# Altium PCB F405RG_Core.PcbDoc
Units mil, origin at the board's own origin, x right, y up, seen from the top; angles counter-clockwise.
Board outline 6000 x 4000 mil, 2 copper layers (Top Layer, Bottom Layer); 21 components, 60 nets, 158 pads, 2 vias.
Unrouted connection lines stored in the file: 32.
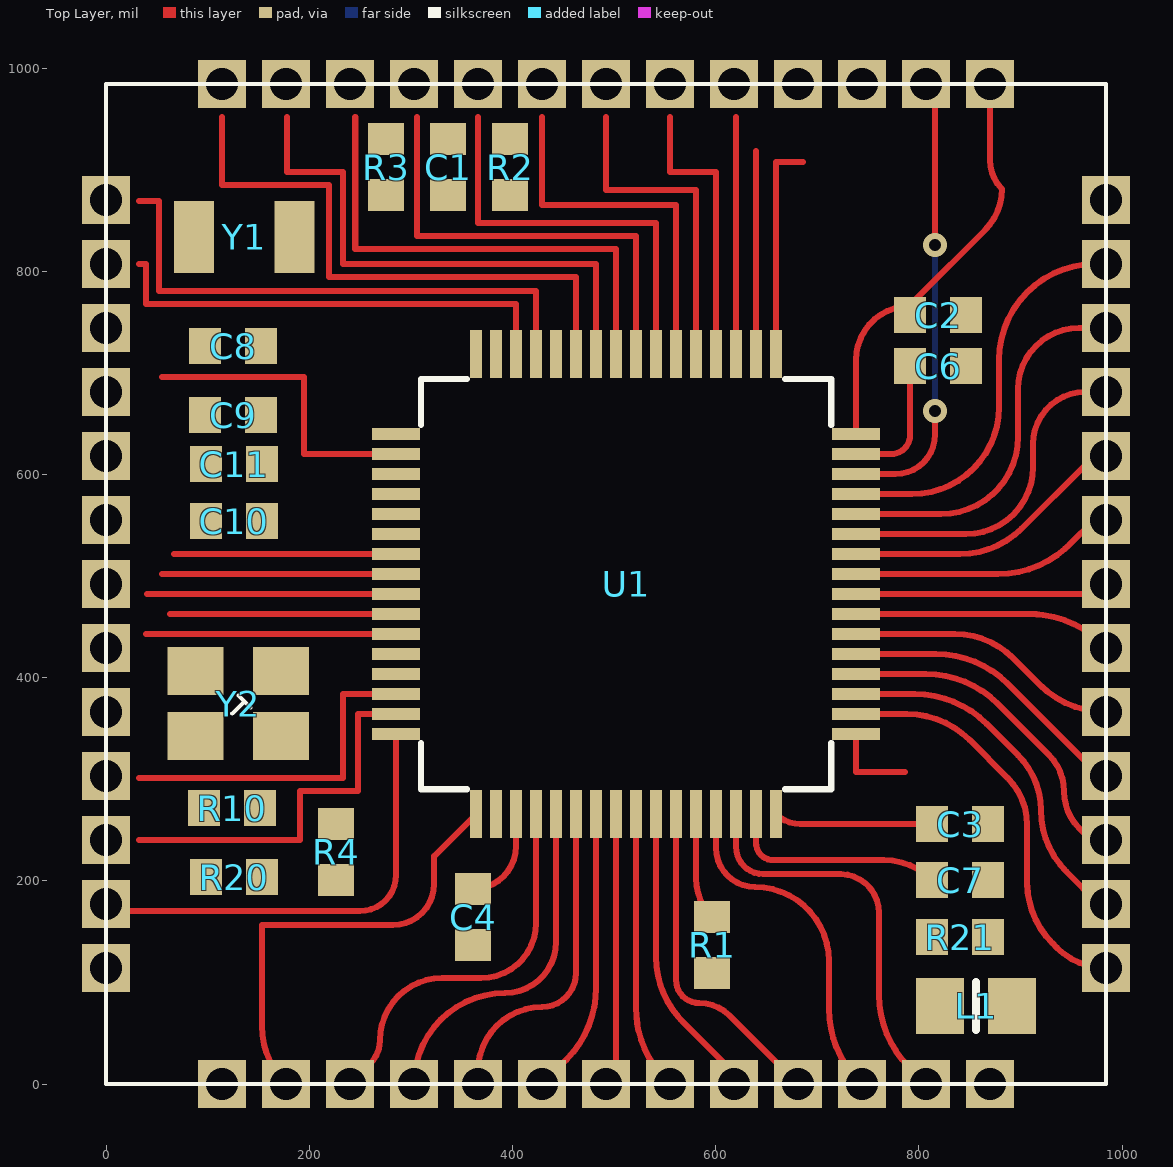
[diagram p0: Top Layer view]
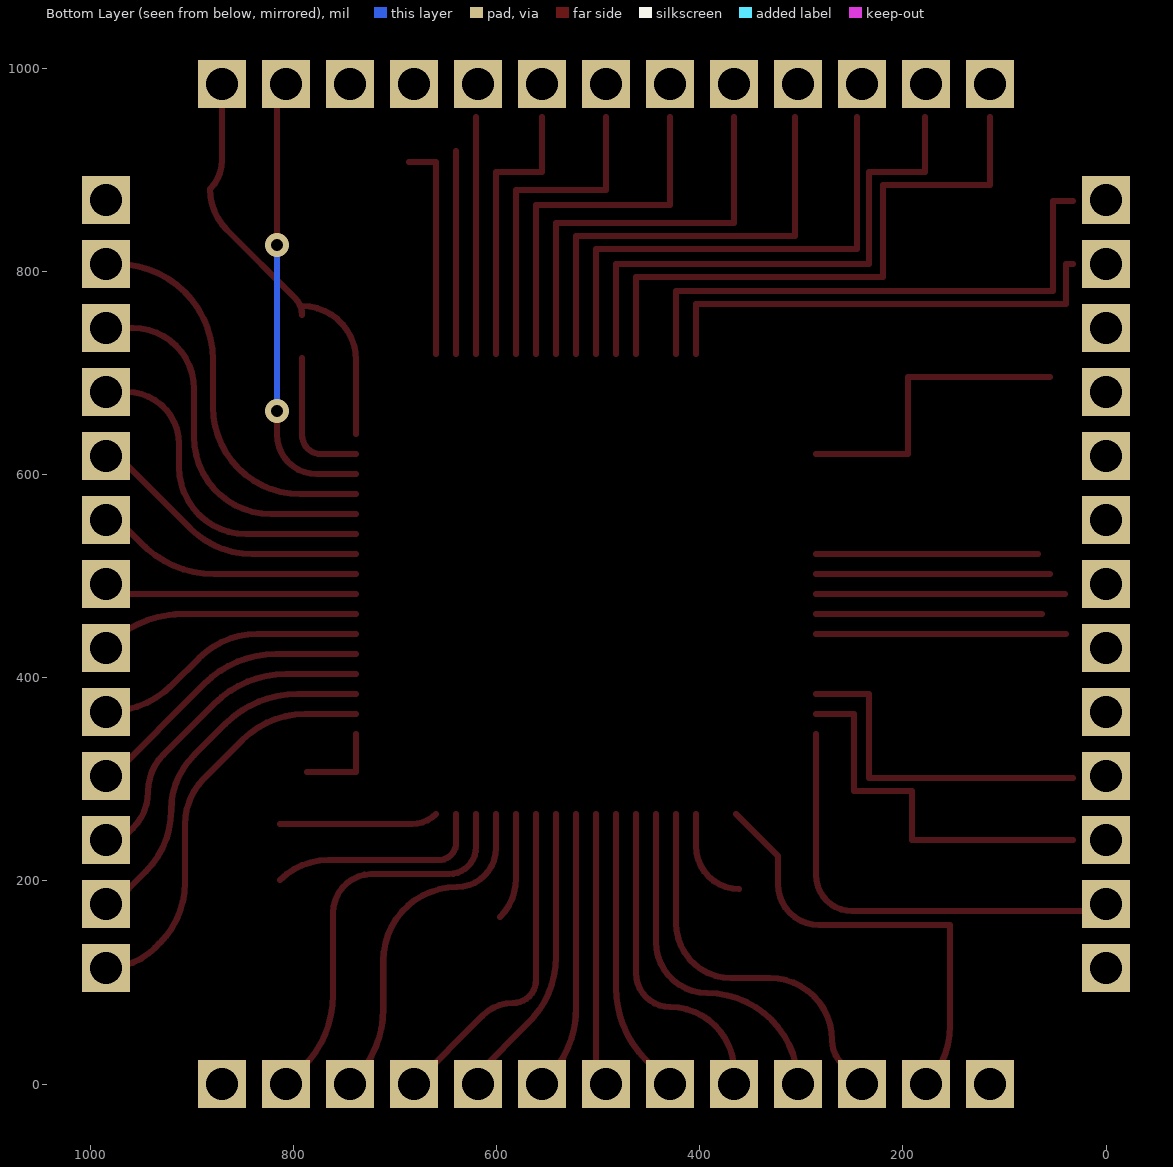
[diagram p1: Bottom Layer view, seen from below]

## Layer stack, top to bottom
Top Solder: solder mask 0.4, Solder Resist, Dk 3.5
Top Layer: signal copper 1.4
Dielectric 1: dielectric 12.6, FR-4, Dk 4.8
Bottom Layer: signal copper 1.4
Bottom Solder: solder mask 0.4, Solder Resist, Dk 3.5

## Board outline
-9101,-2346.26 -3101,-2346.26 -3101,1653.74 -9101,1653.74

## Design rules (kind name [scope] priority, off if disabled: settings)
Clearance [All] p1: gap=6 ignorepadtopadclearanceinfootprint=FALSE
PolygonConnect [All] p1: connectstyle=Relief reliefconductorwidth=10 reliefentries=4 polygonreliefangle="90 Angle" airgapwidth=10
RoutingVias [All] p1: holewidth=12 width=24 viastyle="Through Hole" minholewidth=12 minwidth=18 maxholewidth=28 maxwidth=50
SolderMaskExpansion [All] p1: expansion=4
Width [All] p1: maxlimit=10000 minlimit=6 preferedwidth=9
30 further rules are at their usual default settings.

## Components (designator, comment, footprint, x,y, rotation, side; value= is the part's Value field where it differs from the comment)
C1 "104" 0603 336.61,902.56 r270 top
C2 "104" 0603 818.9,756.89 r180 top
C3 "104" 0603 840.55,255.91 r180 top
C4 "104" 0603 361.22,164.37 r90 top
C6 "2.2u" 0603 818.9,706.69 r180 top
C7 "2.2u" 0603 840.55,200.79 r180 top
C8 "15p" 0603 125,726.38 r180 top
C9 "15p" 0603 125,658.46 r180 top
C10 "22p" 0603 125.98,554.13 r180 top
C11 "22p" 0603 125.98,610.24 r180 top
L1 "Red" 0805 856.3,76.77 r180 top
R1 "10k" 0603 596.46,136.81 r90 top
R2 "10k" 0603 397.64,902.56 r90 top
R3 "10k" 0603 275.59,902.56 r270 top
R4 "10" 0603 226.38,228.35 r270 top
R10 "1M" 0603 124.02,271.65 r0 top
R20 "10k" 0603 125.98,203.74 r180 top
R21 "1k" 0603 840.55,144.69 r180 top
U1 "STM32F4x5RG" LQFP64-10x10mm 511.81,492.13 r0 top value=Value
Y1 "32" 3215-2 185.61,833.66 r180 top
Y2 "25" 3225-4 201.24,431.52 r180 top

## Footprints (in the part's own frame and the unit in brackets; to place one, negate y for a bottom-side part, rotate by r counter-clockwise, add the part's x,y. Pads: shape width x height; smd on the part's side, far side on the other; paste and mask are expansions set on the pad)
0603 [mm] "Chip Capacitor, Body 1.6x0.8mm, IPC High Density"
  rect 0.8x0.9 smd: 1(-0.7,0) 2(0.7,0)
  body extent -0.87,-0.48 0.87,0.48, height 1.3
0805 [mm] "Chip Resistor, Body 2.0x1.2mm, IPC Medium Density"
  rect 1.2x1.4 smd: 1(-0.9,0) 2(0.9,0)
  silkscreen extent 0,-0.6 0,0.6, body extent -1.07,-0.7 1.08,0.7, height 0.7
3215-2 [mm] "XTAL"
  rect 1x1.8 smd: 1(0,0) 2(2.515,0)
3225-4 [mm] "XTAL"
  rect 1.4x1.2 smd: 1(0.737,0.635) 2(2.87,0.635) 3(2.87,2.261) 4(0.737,2.261)
  silkscreen extent 1.5,1.24 1.96,1.7
LQFP64-10x10mm [mil]
  rect 47x12 smd: 1(-226.38,147.64) 2(-226.38,127.95) 3(-226.38,108.27) 4(-226.38,88.58) 5(-226.38,68.9) 6(-226.38,49.21) 7(-226.38,29.53) 8(-226.38,9.84) 9(-226.38,-9.84) 10(-226.38,-29.53) 11(-226.38,-49.21) 12(-226.38,-68.9) 13(-226.38,-88.58) 14(-226.38,-108.27) 15(-226.38,-127.95) 16(-226.38,-147.64) 33(226.38,-147.64) 34(226.38,-127.95) 35(226.38,-108.27) 36(226.38,-88.58) 37(226.38,-68.9) 38(226.38,-49.21) 39(226.38,-29.53) 40(226.38,-9.84) 41(226.38,9.84) 42(226.38,29.53) 43(226.38,49.21) 44(226.38,68.9) 45(226.38,88.58) 46(226.38,108.27) 47(226.38,127.95) 48(226.38,147.64)
  rect 12x47 smd: 17(-147.64,-226.38) 18(-127.95,-226.38) 19(-108.27,-226.38) 20(-88.58,-226.38) 21(-68.9,-226.38) 22(-49.21,-226.38) 23(-29.53,-226.38) 24(-9.84,-226.38) 25(9.84,-226.38) 26(29.53,-226.38) 27(49.21,-226.38) 28(68.9,-226.38) 29(88.58,-226.38) 30(108.27,-226.38) 31(127.95,-226.38) 32(147.64,-226.38) 49(147.64,226.38) 50(127.95,226.38) 51(108.27,226.38) 52(88.58,226.38) 53(68.9,226.38) 54(49.21,226.38) 55(29.53,226.38) 56(9.84,226.38) 57(-9.84,226.38) 58(-29.53,226.38) 59(-49.21,226.38) 60(-68.9,226.38) 61(-88.58,226.38) 62(-108.27,226.38) 63(-127.95,226.38) 64(-147.64,226.38)
  silkscreen extent -202,-202 202,202, body extent -236,-236 236,236, height 63

## Part data
C1 C2 C3 C4 C6 C7 C8 C9 C10 C11: library part C, "Capacitor", LatestRevisionDate=17-Jul-2002, LatestRevisionNote="Re-released for DXP Platform.", PackageDescription="Radial Cap, Thru-Hole; 2 Leads; 0.3 in Pin Spacing", PackageReference=RAD-0.3, Published=8-Jun-2000, Publisher="Altium Limited"
L1: library part LED, "LED", LatestRevisionDate=08-Jul-2005, LatestRevisionNote="Mech Layer 1 removed.", PackageDescription="LED; 2 Leads", PackageReference=LED-0, Published=8-Jun-2000, Publisher="Altium Limited"
R1 R2 R3 R4 R10 R20 R21: library part R, "Resistor", LatestRevisionDate=17-Jul-2002, LatestRevisionNote="Re-released for DXP Platform.", PackageDescription="Axial Device, Thru-Hole; 2 Leads; 0.4 in Pin Spacing", PackageReference=AXIAL-0.4, Published=8-Jun-2000, Publisher="Altium Limited"
U1: "Mcu", Manufacturer_Part_Number=stm32f4x5rg, C="Copyright (C) 2016 Accelerated Designs. All rights reserved", Copyright="Copyright (C) 2016 Accelerated Designs. All rights reserved", RefDes=RefDes, Type=Type, Vendor=STMicroelectronics
Y1 Y2: library part XTAL, "Crystal Oscillator", LatestRevisionDate=17-Jul-2002, LatestRevisionNote="Re-released for DXP Platform.", Published=8-Jun-2000, Publisher="Altium Limited"

## Free pads (board coordinates)
  rect 47.24x47.24 hole 31.5: 8(114.17,984.25) 8(984.25,114.17) 9(0,114.17) 9(0,177.17) 9(0,303.15) 9(0,429.13) 9(0,555.12) 9(0,681.1) 9(0,807.09) 9(114.17,0) 9(177.17,0) 9(177.17,984.25) 9(303.15,984.25) 9(303.15,0) 9(429.13,0) 9(429.13,984.25) 9(555.12,984.25) 9(555.12,0) 9(681.1,0) 9(681.1,984.25) 9(807.09,984.25) 9(807.09,0) 9(870.08,984.25) 9(984.25,177.17) 9(984.25,303.15) 9(984.25,429.13) 9(984.25,555.12) 9(984.25,681.1) 9(984.25,807.09) 9(984.25,870.08) 10(0,240.16) 10(0,366.14) 10(0,492.13) 10(0,618.11) 10(0,744.09) 10(0,870.08) 10(240.16,0) 10(240.16,984.25) 10(366.14,984.25) 10(366.14,0) 10(492.13,0) 10(492.13,984.25) 10(618.11,0) 10(618.11,984.25) 10(744.09,0) 10(744.09,984.25) 10(870.08,0) 10(984.25,240.16) 10(984.25,366.14) 10(984.25,492.13) 10(984.25,618.11) 10(984.25,744.09)

## Via types
v1: diameter 24, hole 12, Top Layer to Bottom Layer, 2 vias

## Nets (pads, with @x,y where several pads share a name; then routed paths per layer and width w, separated by ;. In a path a pad name is that pad's centre, name@x,y a point inside that pad or via, vN(x,y) a via of type N, cw(c..) or ccw(c..) an arc to the next point about the centre after c; other vN are vias at no path point)
A0: pad.9@0,303.15 U1.14 | length 335.5
  Top Layer w6: 32.62,301.18 233.27,301.18 233.27,383.86 U1.14
A1: pad.10@0,240.16 U1.15 | length 376.8
  Top Layer w6: 32.62,240.16 190.94,240.16 190.94,288.39 248.03,288.39 248.03,364.17 U1.15
A2: pad.9@0,177.17 U1.16 | length 439.5
  Top Layer w6: pad.9@4.92,170.28 250,170.28 ccw(c250,205.71) 285.43,205.71 U1.16
A3: pad.9@177.17,0 U1.17 | length 441.2
  Top Layer w6: pad.9@177.17,0 cw(c234.19,57.03) 153.54,57.03 153.54,156.5 282.48,156.5 ccw(c282.48,196.85) 322.83,196.85 322.83,224.41 U1.17
A4: pad.10@240.16,0 U1.20 | length 380.7
  Top Layer w6: pad.10@240.16,0 259.94,19.78 ccw(c236.42,43.31) 269.69,43.31 cw(c330.71,43.31) 330.71,104.33 369.09,104.33 ccw(c369.09,158.46) 423.23,158.46 U1.20
A5: pad.9@303.15,0 U1.21 | length 345.5
  Top Layer w6: pad.9@303.15,0 cw(c392.72,0) 392.72,89.57 ccw(c392.72,139.76) 442.91,139.76 U1.21
A6: pad.10@366.14,0 U1.22 | length 320.8
  Top Layer w6: pad.10@366.14,0 366.14,12.8 cw(c429.13,12.8) 429.13,75.79 ccw(c429.13,109.25) 462.6,109.25 U1.22
A7: pad.9@429.13,0 U1.23 | length 283.5
  Top Layer w6: pad.9@429.13,0 452.99,23.86 ccw(c382.28,94.57) 475.38,58.07 ccw(c382.28,94.57) 482.28,94.57 U1.23
A8: pad.9@984.25,555.12 U1.41 | length 252
  Top Layer w6: U1.41 877.87,501.97 ccw(c877.87,601.97) 943.9,526.87 ccw(c877.87,601.97) 948.58,531.26 pad.9@972.44,555.12
A9: pad.10@984.25,618.11 U1.42 | length 281.1
  Top Layer w6: U1.42 840.55,521.65 ccw(c840.55,607.2) 901.01,546.68 ; 901.04,546.71 pad.10@964.09,609.76 ; pad.10@964.1,609.77 cw(c984.25,589.6) pad.10@984.25,618.11
A10: pad.9@984.25,681.1 U1.43 | length 335.6
  Top Layer w6: U1.43 846.46,541.34 ccw(c846.46,607.28) 912.4,607.28 912.4,629.92 cw(c963.58,629.92) 963.58,681.1 pad.9@984.25,681.1
A11: pad.10@984.25,744.09 U1.44 | length 370.8
  Top Layer w6: U1.44 821.85,561.02 ccw(c821.85,636.81) 897.64,636.81 897.64,684.06 cw(c957.68,684.06) 957.68,744.09 pad.10@984.25,744.09
A12: pad.9@984.25,807.09 U1.45 | length 395.1
  Top Layer w6: U1.45 793.31,580.71 ccw(c793.31,666.34) 878.94,666.34 878.94,712.6 cw(c973.43,712.6) 973.43,807.09 pad.9@984.25,807.09
A13: pad.9@807.09,984.25 U1.46 | length 447.3
  Top Layer w6: U1.46 777.07,600.39 ccw(c777.07,639.27) 815.94,639.27 v1(815.94,662.4) ; pad.9@807.09,984.25 cw(c785.7,962.87) 815.94,962.87 v1(815.94,825.79)
  Bottom Layer w6: v1(815.94,662.4) v1(815.94,825.79)
A14: U1.49 | length 215.6
  Top Layer w6: U1.49 659.45,907.48 686.02,907.48
A15: U1.50 | length 199.8
  Top Layer w6: U1.50 639.76,918.31
B0: pad.10@618.11,0 U1.26 | length 293.7
  Top Layer w6: U1.26 541.34,125 ccw(c631.63,125) 563.33,65.94 ccw(c631.63,125) 567.79,61.15 618.11,10.83 pad.10@618.11,0
B1: pad.9@681.1,0 U1.27 | length 327.6
  Top Layer w6: U1.27 561.02,102.36 ccw(c583.66,102.36) 583.66,79.72 cw(c583.66,36.95) 613.9,67.2 pad.9@681.1,0
B3: U1.55 | length 408.3
  Top Layer w6: 366.14,951.63 366.14,847.44 541.34,847.44 U1.55
B4: U1.56 | length 448.7
  Top Layer w6: 306.1,951.63 306.1,834.65 521.65,834.65 U1.56
B5: U1.57 | length 489.8
  Top Layer w6: 245.27,951.63 245.27,821.85 501.97,821.85 U1.57
B6: U1.58 | length 537.3
  Top Layer w6: 178.15,951.63 178.15,897.64 233.27,897.64 233.27,807.09 482.28,807.09 U1.58
B7: U1.59 | length 581.6
  Top Layer w6: 114.17,951.63 114.17,884.84 219.49,884.84 219.49,794.29 462.6,794.29 U1.59
B8: U1.61 | length 541.2
  Top Layer w6: 32.62,869.09 52.17,869.09 52.17,780.51 423.23,780.51 U1.61
B9: U1.62 | length 459.5
  Top Layer w6: 32.62,807.09 39.37,807.09 39.37,767.72 403.54,767.72 U1.62
B10: pad.10@744.09,0 U1.29 | length 338.4
  Top Layer w6: U1.29 600.39,232.28 ccw(c638.78,232.28) 638.78,193.9 cw(c638.78,121.25) 711.43,121.25 711.43,74.09 ccw(c811.43,74.09) 740.71,3.38 pad.10@744.09,0
B11: pad.9@807.09,0 U1.30 | length 393.5
  Top Layer w6: U1.30 620.08,233.27 ccw(c646.65,233.27) 646.65,206.69 722.44,206.69 cw(c722.44,168.31) 723.43,206.68 cw(c722.44,168.31) 760.83,168.31 760.83,87.68 ccw(c860.83,87.68) 790.12,16.97 pad.9@807.09,0
B12: pad.10@870.08,0 U1.33 | length 85.6
  Top Layer w6: U1.33 738.19,307.09 786.42,307.09
B13: pad.8@984.25,114.17 U1.34 | length 406
  Top Layer w6: U1.34 788.39,364.17 cw(c788.39,277.17) 849.88,338.72 ; 849.91,338.69 887.52,301.08 cw(c841.36,254.92) 906.64,254.92 906.64,198.08 ccw(c990.41,198.08) 931.17,138.85 935.77,134.26 ; 935.78,134.24 ccw(c984.25,182.74) pad.8@984.25,114.17
B14: pad.9@984.25,177.17 U1.35 | length 352.6
  Top Layer w6: U1.35 796,383.86 cw(c796,283.86) 866.71,354.57 897.81,323.47 cw(c844.02,269.69) 920.09,269.69 ccw(c1005.63,269.69) 945.14,209.2 pad.9@977.17,177.17
B15: pad.10@984.25,240.16 U1.36 | length 329.8
  Top Layer w6: U1.36 807,403.54 cw(c807,303.54) 877.71,374.25 927.95,324.02 cw(c891.83,287.89) 942.91,287.89 ccw(c994,287.89) 957.88,251.77 969.49,240.16 pad.10@984.25,240.16
C0: pad.9@0,555.12 U1.8 | length 230.3
  Top Layer w6: 55.12,501.97 U1.8
C1: pad.10@0,492.13 U1.9 | length 245.1
  Top Layer w6: 40.35,482.28 U1.9
C2: pad.9@0,429.13 U1.10 | length 222.4
  Top Layer w6: 62.99,462.6 U1.10
C3: pad.10@0,366.14 U1.11 | length 246.1
  Top Layer w6: 39.37,442.91 U1.11
C4: pad.10@492.13,0 U1.24 | length 268.4
  Top Layer w6: pad.10@492.13,0 ccw(c468.36,23.76) 501.97,23.76 U1.24
C5: pad.9@555.12,0 U1.25 | length 275.3
  Top Layer w6: U1.25 521.65,74.89 ccw(c621.65,74.89) 524.27,52.17 ccw(c621.65,74.89) 550.94,4.18 pad.9@555.12,0
C6: pad.9@984.25,303.15 U1.37 | length 299.1
  Top Layer w6: U1.37 816.85,423.23 cw(c816.85,323.23) 887.56,393.94 pad.9@978.35,303.15 ; pad.9@970.75,303.15 pad.9@978.35,303.15 ; pad.9@984.25,303.15 pad.9@978.35,303.15
C7: pad.10@984.25,366.14 U1.38 | length 270.4
  Top Layer w6: U1.38 835.69,442.91 cw(c835.69,362.26) 892.72,419.29 918.72,393.28 ccw(c984.25,458.81) pad.10@984.25,366.14
C8: pad.9@984.25,429.13 U1.39 | length 255.6
  Top Layer w6: U1.39 909.37,462.6 cw(c909.37,362.6) 922.24,461.77 cw(c909.37,362.6) 980.08,433.31 pad.9@984.25,429.13
C9: pad.10@984.25,492.13 U1.40 | length 242.1
  Top Layer w6: U1.40 pad.10@980.32,482.28
C10: U1.51 | length 233.1
  Top Layer w6: U1.51 620.08,951.63
C11: U1.52 | length 278.4
  Top Layer w6: 555.12,951.63 555.12,897.64 600.39,897.64 U1.52
C12: U1.53 | length 321.7
  Top Layer w6: 492.13,951.63 492.13,879.92 580.71,879.92 U1.53
C13: pad.9@0,681.1 U1.2 | length 306.1
  Top Layer w6: 55.12,695.87 194.88,695.87 194.88,620.08 U1.2
D2: U1.54 | length 365
  Top Layer w6: 429.13,951.63 429.13,865.16 561.02,865.16 U1.54
GND: C1.1 C2.1 C3.1 C4.1 C6.1 C7.1 C8.2 C9.2 C10.2 C11.2 pad.9@984.25,870.08 R1.1 R2.2 R21.1 U1.12 U1.18 U1.63
NetC6_2: C6.2 U1.47 | length 139.6
  Top Layer w6: U1.47 772.64,620.08 ccw(c772.64,638.78) 791.34,638.78 C6.2 C6.2@791.34,714.57
NetC7_2: C7.2 U1.31 | length 216.6
  Top Layer w6: U1.31 639.76,237.2 ccw(c656.5,237.2) 656.5,220.47 765.47,220.47 cw(c765.47,153.26) C7.2
NetC8_1: C8.1 U1.3 Y1.2
NetC9_1: C9.1 U1.4 Y1.1
NetC10_1: C10.1 R10.2 U1.6 Y2.1
NetC11_1: C11.1 R10.1 U1.5 Y2.3
NetC20_2: R3.2 U1.1
NetL1_2: L1.2 R21.2
NetR1_2: R1.2 U1.28 | length 105.6
  Top Layer w6: U1.28 580.71,202.39 ccw(c634.48,202.39) R1.2
NetR2_1: R2.1 U1.60
NetR4_1: R4.1 U1.13
RST: pad.10@0,618.11 R20.1 U1.7 | length 218.3
  Top Layer w6: 67.12,521.65 U1.7
VCC: C1.2 C2.2 C3.2 C4.2 L1.1 pad.9@870.08,984.25 R3.1 R4.2 R20.2 U1.19 U1.32 U1.48 U1.64 | length 675
  Top Layer w6: C4.2 ccw(c361.22,234.25) 403.54,234.25 U1.19 ; U1.32 ccw(c683.21,289.51) 683.21,255.91 C3.2 ; U1.48 738.19,712.6 cw(c791.34,712.6) C2.2@791.34,765.75 ; C2.2 cw(c815.1,756.89) 798.29,773.69 865.19,840.58 ccw(c824.86,880.91) 881.89,880.91 cw(c910.4,909.42) 870.08,909.42 pad.9@870.08,984.25
pads on no net: Y2.2 Y2.4

## Silkscreen, mask and mechanical layers (free items; w line width, h text height)
Top Overlay:
  lines w4: 984.25,975.76 984.25,984 ; 0,0 0,984.25 984.25,984.25 984.25,0 0,0